# Allegro board 14135-IMX185_MI_REFB_VER_A.brd
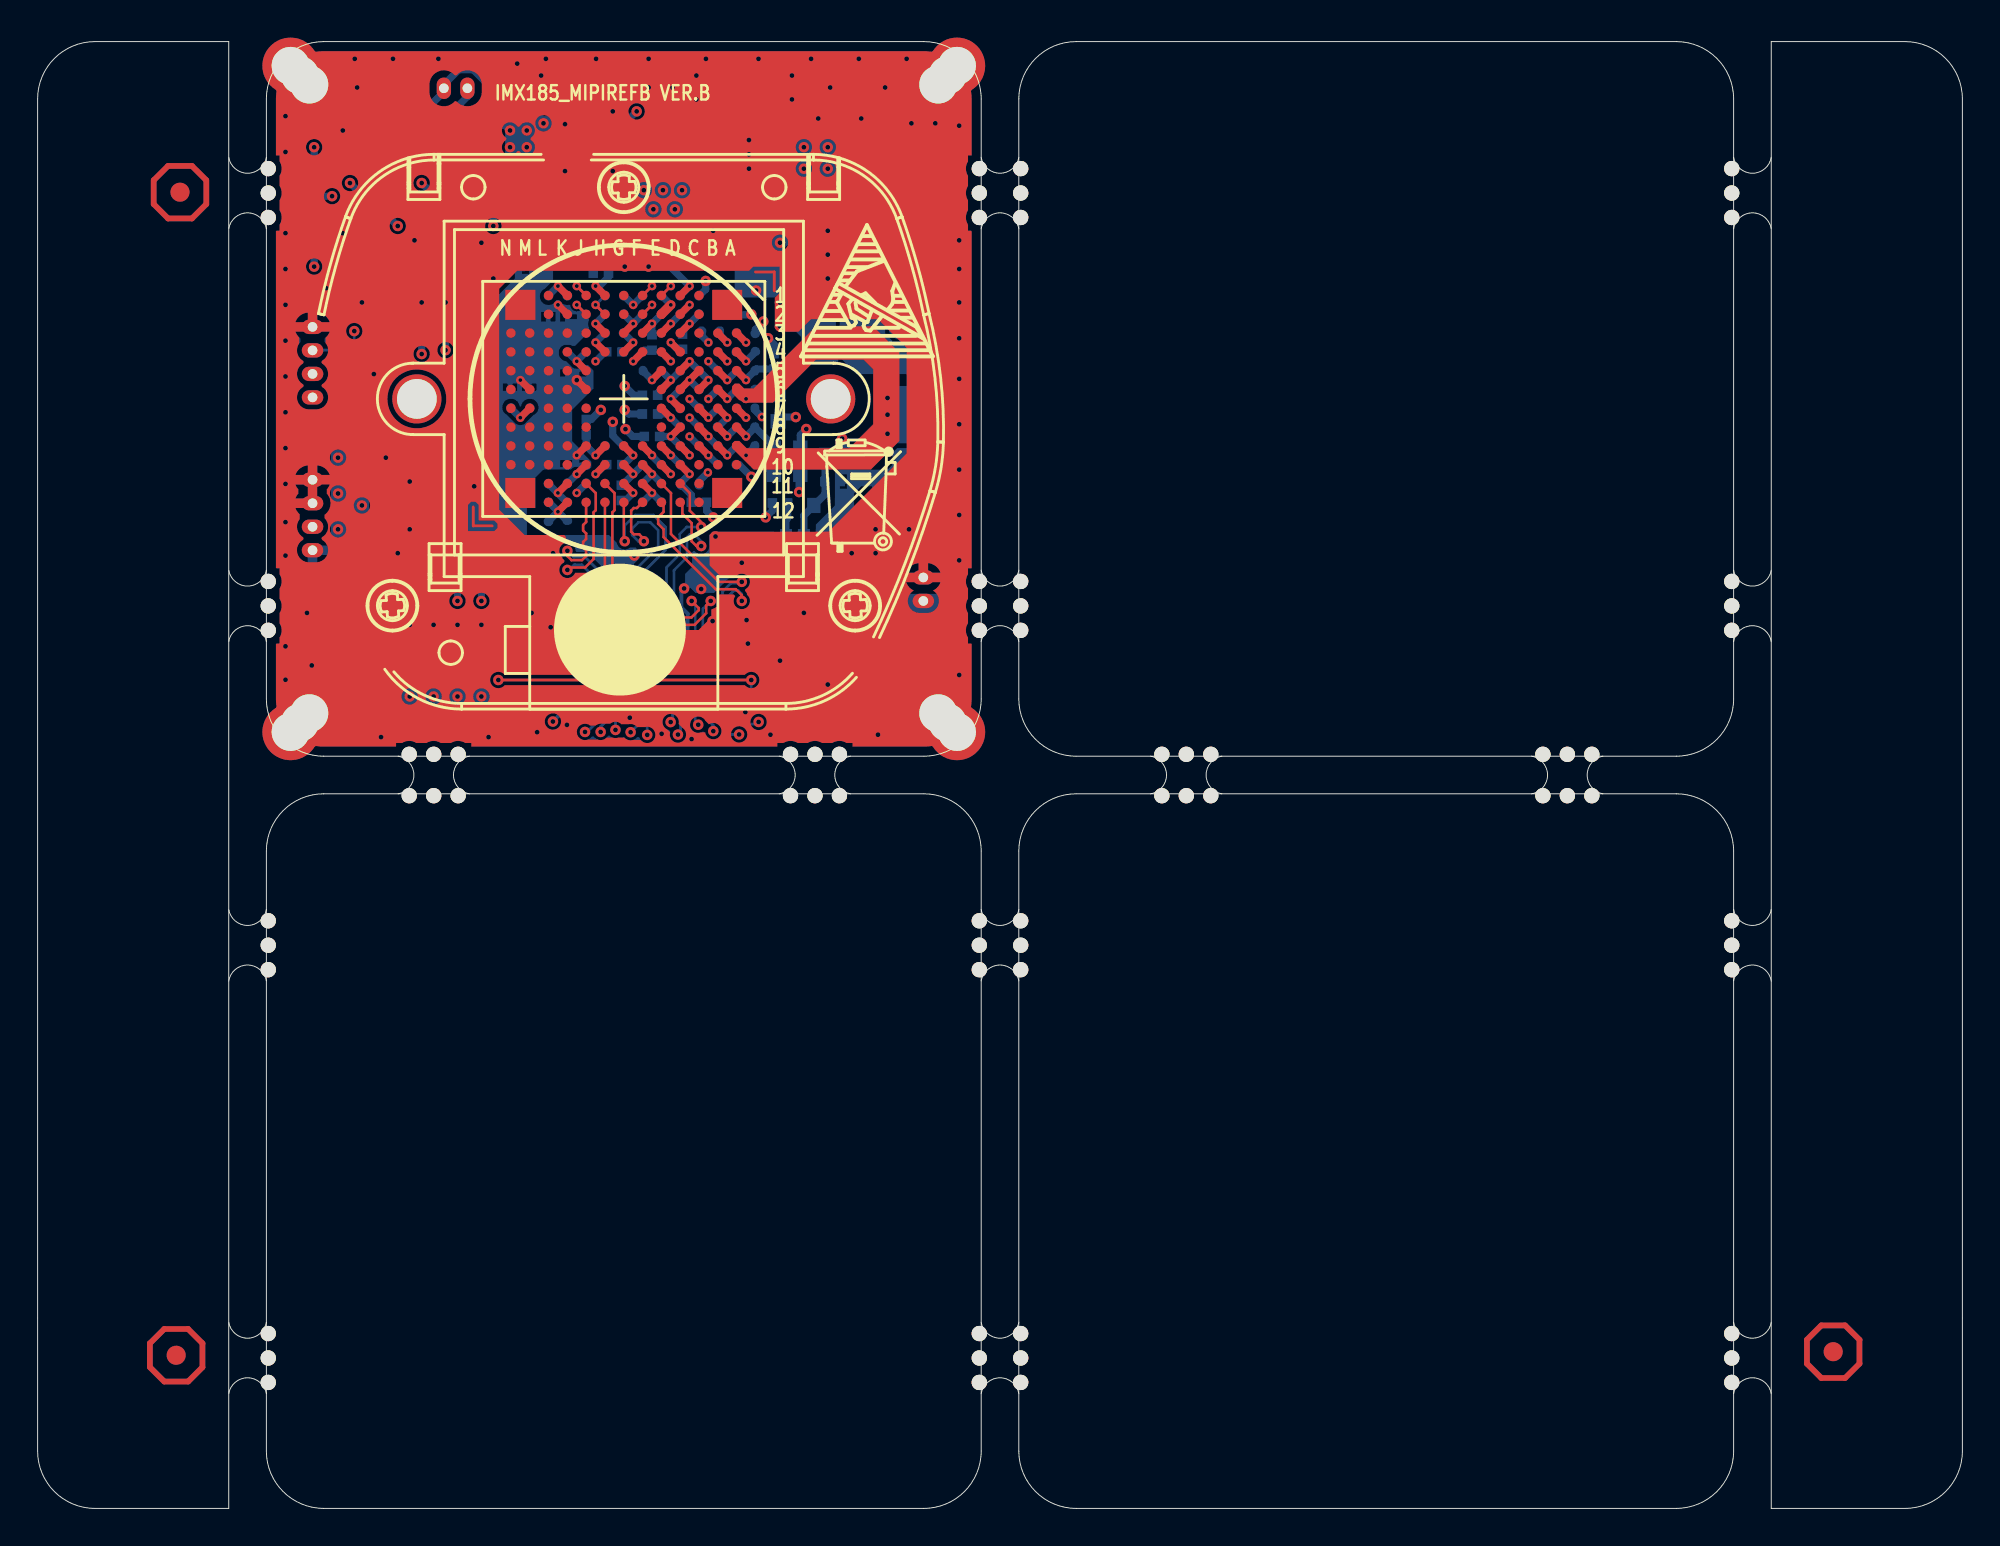
[diagram p0: board, top side]
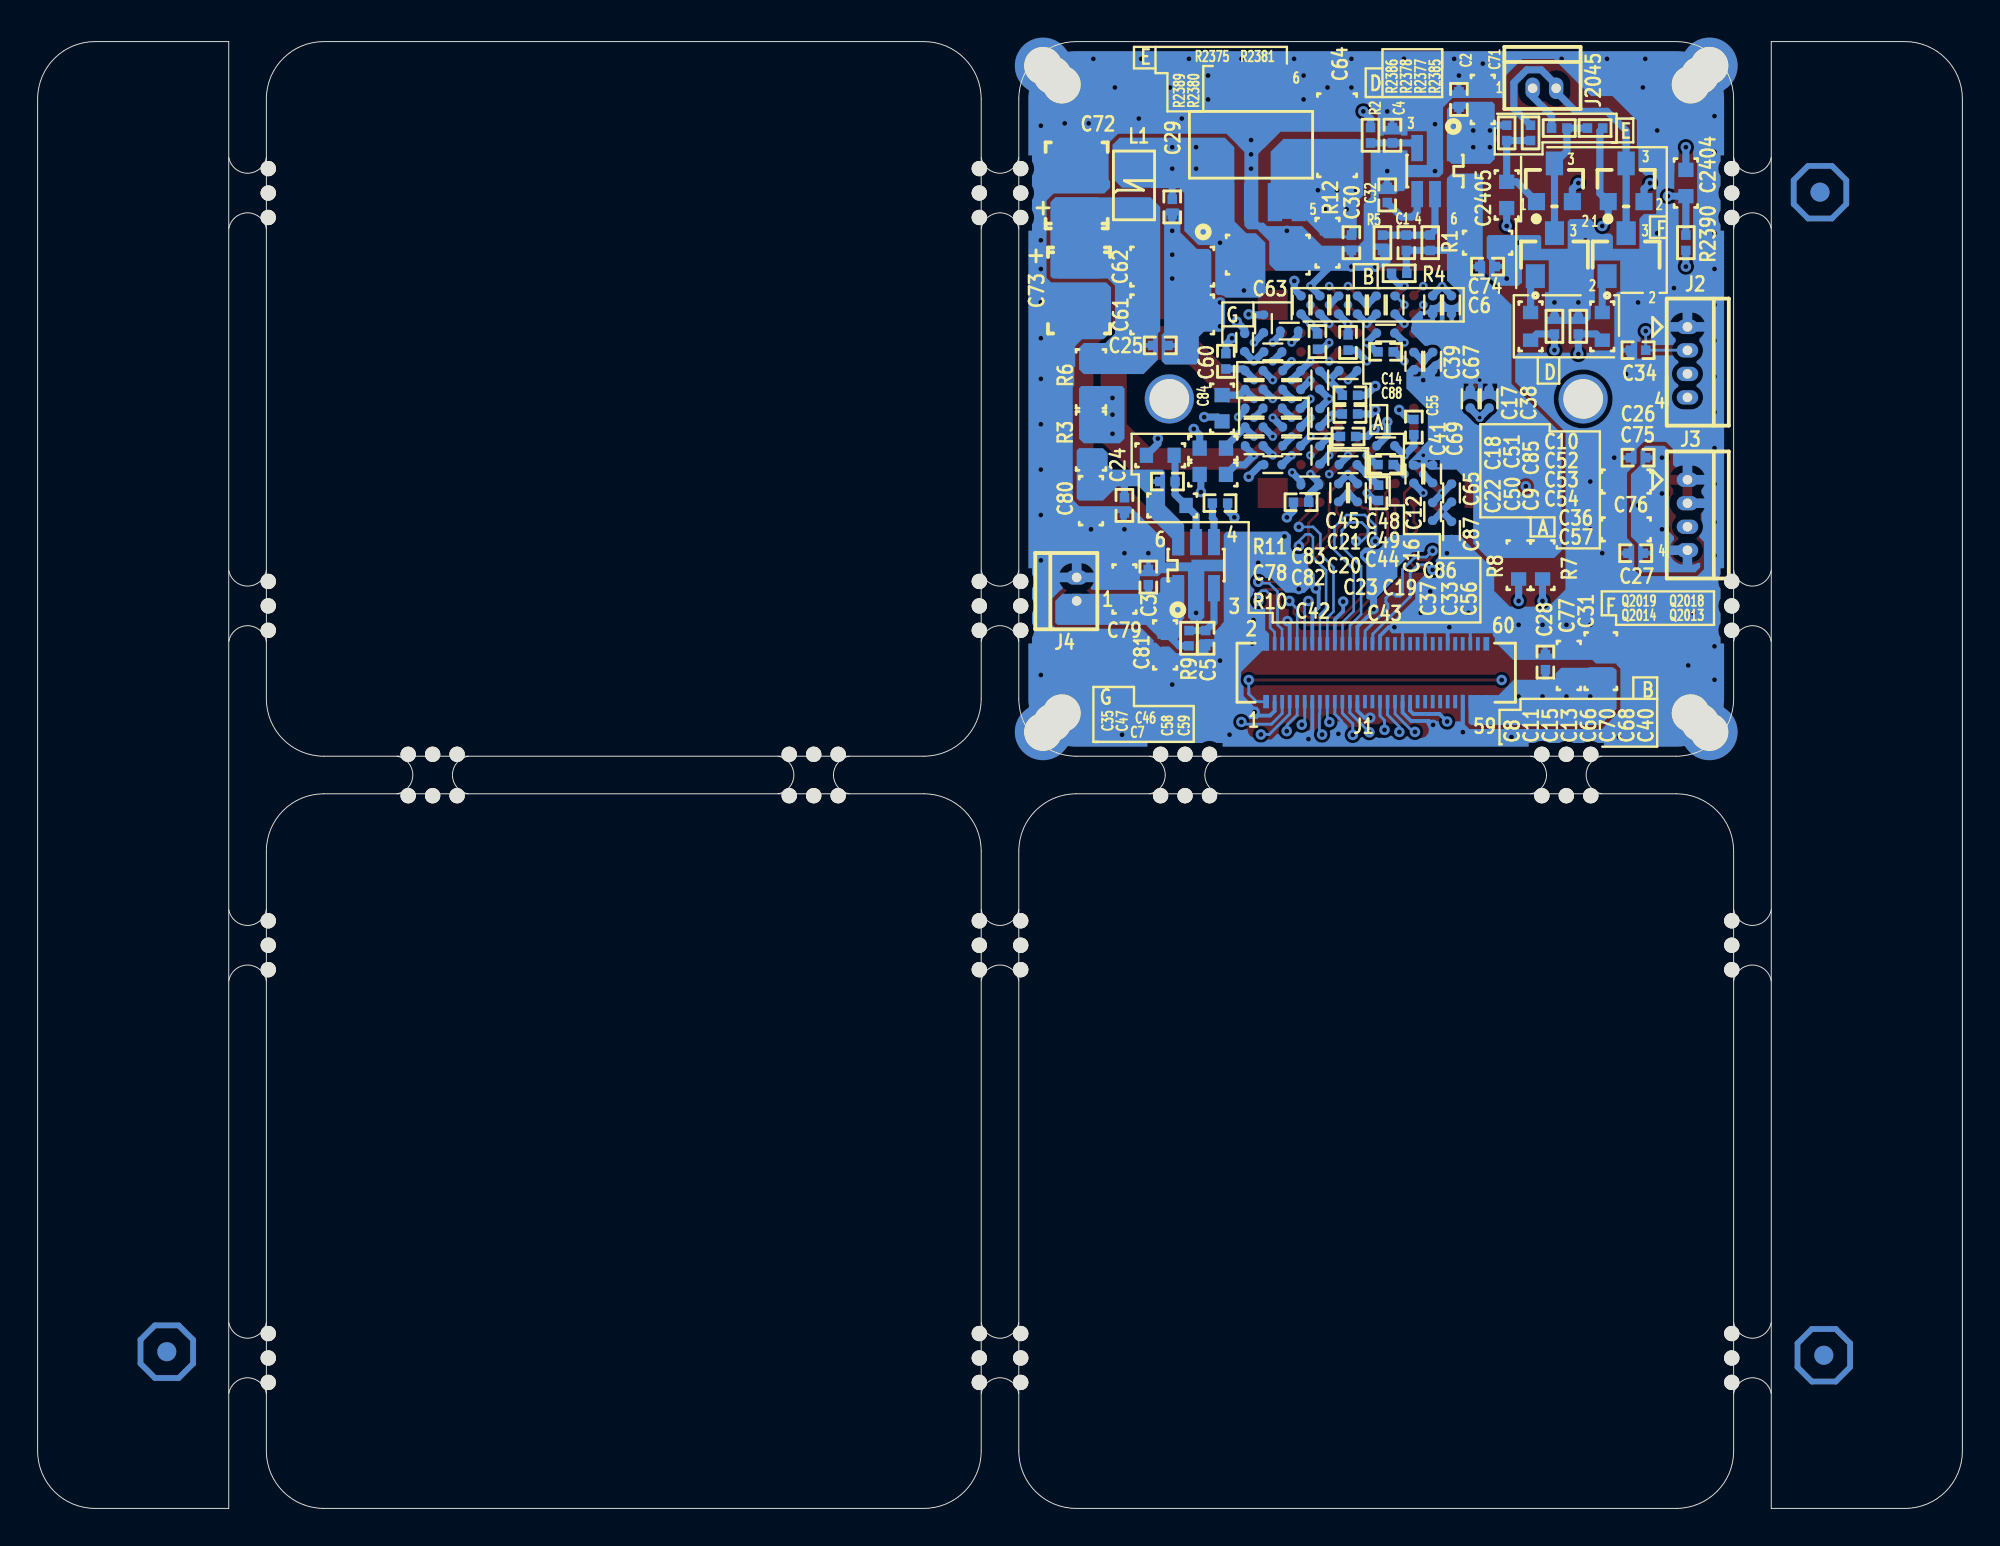
[diagram p1: board, bottom side, seen from below]

Outline 102.32 x 78 mm; copper layers: TOP, GND02, ART03, ART04, POWER05, BOTTOM. Coordinates in mm from the lower left corner of the outline.
Outline path: 0,74.95 arc(0.89,77.11) 3.05,78 10.16,78 10.16,0 3.05,0 arc(0.89,0.89) 0,3.05 0,74.95 ; 12.16,74.95 arc(13.05,77.11) 15.21,78 47.11,78 arc(49.27,77.11) 50.16,74.95 50.16,43.05 arc(49.27,40.89) 47.11,40 15.21,40 arc(13.05,40.89) 12.16,43.05 12.16,74.95 ; 12.16,34.95 arc(13.05,37.11) 15.21,38 47.11,38 arc(49.27,37.11) 50.16,34.95 50.16,3.05 arc(49.27,0.89) 47.11,0 15.21,0 arc(13.05,0.89) 12.16,3.05 12.16,34.95 ; 52.16,74.95 arc(53.05,77.11) 55.21,78 87.11,78 arc(89.27,77.11) 90.16,74.95 90.16,43.05 arc(89.27,40.89) 87.11,40 55.21,40 arc(53.05,40.89) 52.16,43.05 52.16,74.95 ; 52.16,34.95 arc(53.05,37.11) 55.21,38 87.11,38 arc(89.27,37.11) 90.16,34.95 90.16,3.05 arc(89.27,0.89) 87.11,0 55.21,0 arc(53.05,0.89) 52.16,3.05 52.16,34.95 ; 92.16,78 99.27,78 arc(101.43,77.11) 102.32,74.95 102.32,3.05 arc(101.43,0.89) 99.27,0 92.16,0 92.16,78

## Design rules (mm)
net group DIFFPAIR0: nets MIPI0_CKM MIPI0_CKP
net group DIFFPAIR1: nets MIPI0_D3M MIPI0_D3P
net group DIFFPAIR2: nets MIPI0_D0M MIPI0_D0P
net group DIFFPAIR3: nets MIPI0_D1M MIPI0_D1P
net group DIFFPAIR4: nets MIPI0_D2M MIPI0_D2P

## Placement (name value [footprint] x y rotation side)
C1  15PF  [SC0402]  29.56 67.3 90 bottom
C2  15PF  [SC0402]  26.76 74.92 90 bottom
C3  15PF  [SC0402]  43.27 49.52 90 bottom
C4  15PF  [SC0402]  30.3 73.02 90 bottom
C5  15PF  [SC0402]  40.23 46.27 270 bottom
C6  15PF  [SC0402]  25.24 66.03 180 bottom
C7  2.2UF  [SC0402-BGA]  36.65 61.5 180 bottom
C8  2.2UF  [SC0402-BGA]  35.16 64 90 bottom
C9  2.2UF  [SC0402-BGA]  34.16 58 90 bottom
C10  2.2UF  [SC0402-BGA]  32.66 60.5 180 bottom
C11  2.2UF  [SC0402-BGA]  34.16 64 90 bottom
C12  2.2UF  [SC0402-BGA]  28.16 53.01 90 bottom
C13  2.2UF  [SC0402-BGA]  32.16 64 90 bottom
C14  2.2UF  [SC0402-BGA]  30.66 62.5 180 bottom
C15  2.2UF  [SC0402-BGA]  33.16 64 90 bottom
C16  2.2UF  [SC0402-BGA]  34.16 56 270 bottom
C17  2.2UF  [SC0402-BGA]  26.16 59 270 bottom
C18  2.2UF  [SC0402-BGA]  37.65 60.5 180 bottom
C19  2.2UF  [SC0402-BGA]  34.69 54.43 0 bottom
C20  2.2UF  [SC0402-BGA]  37.65 56.5 180 bottom
C21  2.2UF  [SC0402-BGA]  37.65 57.5 180 bottom
C22  2.2UF  [SC0402-BGA]  37.65 59.5 180 bottom
C23  2.2UF  [SC0402-BGA]  36.65 55.5 0 bottom
C24  15PF  [SC0402]  44.54 53.33 270 bottom
C25  15PF  [SC0402]  42.64 61.84 180 bottom
C26  15PF  [SC0402]  17.24 55.87 0 bottom
C27  15PF  [SC0402]  17.37 50.79 0 bottom
C28  15PF  [SC0402]  22.17 45 90 bottom
C29  15PF  [SC0402]  42 69.21 270 bottom
C30  15PF  [SC0402]  32.48 67.3 270 bottom
C31  -  [SC0805]  19.22 45.05 90 bottom
C32  15PF  [SC0402]  30.57 69.84 90 bottom
C33  2.2UF  [SC0402-BGA]  32.16 54.01 270 bottom
C34  15PF  [SC0402]  17.24 61.59 0 bottom
C35  2.2UF  [SC0402-BGA]  38.15 62 90 bottom
C36  2.2UF  [SC0402-BGA]  30.66 56.5 0 bottom
C37  2.2UF  [SC0402-BGA]  33.16 54.01 270 bottom
C38  2.2UF  [SC0402-BGA]  25.16 59 270 bottom
C39  2.2UF  [SC0402-BGA]  29.16 61 90 bottom
C40  2.2UF  [SC0402-BGA]  27.16 64 90 bottom
C41  2.2UF  [SC0402-BGA]  29.16 55 270 bottom
C42  15PF  [SC0402]  39.46 53.46 180 bottom
C43  15PF  [SC0402]  35.16 53.51 0 bottom
C44  2.2UF  [SC0402-BGA]  35.65 56.5 180 bottom
C45  2.2UF  [SC0402-BGA]  37.65 58.5 0 bottom
C46  2.2UF  [SC0402-BGA]  35.78 62.61 180 bottom
C47  2.2UF  [SC0402-BGA]  37.15 63 90 bottom
C48  2.2UF  [SC0402-BGA]  35.68 58.5 180 bottom
C49  2.2UF  [SC0402-BGA]  35.65 57.5 180 bottom
C50  2.2UF  [SC0402-BGA]  35.65 59.5 180 bottom
C51  2.2UF  [SC0402-BGA]  35.65 60.5 180 bottom
C52  15PF  [SC0402]  32.56 59.2 180 bottom
C53  15PF  [SC0402]  32.56 58.2 180 bottom
C54  15PF  [SC0402]  32.66 57 180 bottom
C55  15PF  [SC0402]  29.16 57.5 90 bottom
C56  15PF  [SC0402]  31.03 54.01 270 bottom
C57  15PF  [SC0402]  30.66 55.5 180 bottom
C58  15PF  [SC0402]  34.28 62.05 270 bottom
C59  15PF  [SC0402]  32.66 62 270 bottom
C60  15PF  [SC0402]  39.15 61 90 bottom
C61  -  [SC1206]  42 63.49 180 bottom
C62  -  [SC1206]  42 66.03 180 bottom
C63  -  [SC1206]  36.92 66.67 180 bottom
C64  -  [SC1206]  33.24 73.02 90 bottom
C65  2.2UF  [SC0402-BGA]  27.16 54 90 bottom
C66  2.2UF  [SC0402-BGA]  31.16 64 90 bottom
C67  2.2UF  [SC0402-BGA]  28.16 61 90 bottom
C68  2.2UF  [SC0402-BGA]  28.16 64 90 bottom
C69  2.2UF  [SC0402-BGA]  28.16 55 270 bottom
C70  2.2UF  [SC0402-BGA]  30.16 64 270 bottom
C71  10UF  [SC0603]  25.49 74.92 90 bottom
C72  10uF  [STC3528]  47.08 70.35 90 bottom
C73  10uF  [STC3528]  46.96 64.76 270 bottom
C74  10UF  [SC0603]  25.24 67.3 180 bottom
C75  10UF  [SC0603]  17.87 54.6 0 bottom
C76  10UF  [SC0603]  17.87 52.06 0 bottom
C77  10UF  [SC0603]  20.92 44.83 90 bottom
C78  15PF  [SC0402]  42.26 54.6 180 bottom
C79  10UF  [SC0603]  44.54 48.89 90 bottom
C80  10UF  [SC0603]  46.32 53.59 270 bottom
C81  10UF  [SC0603]  42.39 45.92 270 bottom
C82  10UF  [SC0603]  39.85 54.99 0 bottom
C83  10UF  [SC0603]  39.85 56.38 0 bottom
C84  10UF  [SC0603]  39.36 58.5 270 bottom
C85  2.2UF  [SC0402-BGA]  34.16 60 270 bottom
C86  2.2UF  [SC0402-BGA]  32.66 55.5 0 bottom
C87  2.2UF  [SC0402-BGA]  27.16 52 270 bottom
C88  15PF  [SC0402]  30.66 61.5 180 bottom
C2404  10UF  [SC0603]  14.7 70.48 270 bottom
C2405  10UF  [SC0603]  24.22 69.84 90 bottom
J1  -  [SED60-16F-A]  31.16 44.44 180 bottom
J2  -  [WBC0104-49T]  14.61 62.83 270 bottom
J3  -  [WBC0104-49T]  14.61 54.7 270 bottom
J4  -  [SIP-2P-20]  47.08 48.25 90 bottom
J2045  -  [SIP-2P-20]  22.85 75.52 180 bottom
L1  -  [HSL1007]  44.04 70.35 90 bottom
M1  -  [HOLE_3]  13.45 41.29 90 top
M2  -  [HOLE_3]  47.87 75.71 90 top
M3  -  [HOLE_3]  47.87 42.29 0 top
M4  -  [HOLE_3]  13.45 76.71 0 top
NOREF  -  [unnamed]  7.57 69.99 0 top
NOREF#2  -  [unnamed#2]  59.76 39 180 top
NOREF#3  -  [#3]  -206.92 -128.91 0 top
NOREF#4  -  [unnamed#2]  51.16 6.7 270 top
NOREF#5  -  [unnamed#2]  40.02 39 180 top
NOREF#6  -  [unnamed#2]  51.16 28.65 270 top
NOREF#7  -  [#3]  253.21 150.87 0 top
NOREF#8  -  [#3]  31.97 49.75 0 top
NOREF#9  -  [unnamed#2]  19.76 39 180 top
NOREF#10  -  [#3]  235.68 107.82 0 top
NOREF#11  -  [#3]  204.45 8.51 0 top
NOREF#12  -  [unnamed]  95.45 8.33 0 top
NOREF#13  -  [#3]  43.4 64.26 0 top
NOREF#14  -  [unnamed#2]  51.16 68.65 270 top
NOREF#15  -  [#3]  12.16 74.95 0 top
NOREF#16  -  [unnamed#2]  80.02 39 180 top
NOREF#17  -  [unnamed#4]  11.16 6.7 270 top
NOREF#18  -  [unnamed#4]  11.16 68.65 270 top
NOREF#19  -  [unnamed#4]  11.16 28.65 270 top
NOREF#20  -  [unnamed#2]  51.16 46.69 270 top
NOREF#21  -  [unnamed#4]  11.16 46.69 270 top
NOREF#22  -  [#3]  15.21 0 90 top
NOREF#23  -  [#3]  240 50.67 0 top
NOREF#24  -  [#3]  46.2 53.97 0 top
NOREF#25  -  [unnamed]  7.37 8.14 0 top
NOREF#26  -  [#3]  49.07 77.29 0 top
NOREF#27  -  [#3]  15.21 40 90 top
NOREF#28  -  [unnamed#4]  91.16 46.69 270 bottom
NOREF#29  -  [unnamed]  7.57 69.99 180 bottom
NOREF#30  -  [unnamed#4]  91.16 6.7 270 bottom
NOREF#31  -  [unnamed#4]  91.16 68.65 270 bottom
NOREF#32  -  [unnamed]  95.45 8.33 180 bottom
NOREF#33  -  [unnamed]  7.37 8.14 180 bottom
NOREF#34  -  [unnamed#4]  91.16 28.65 270 bottom
Q2013  -  [SOT23]  17.87 66.67 180 bottom
Q2014  -  [SOT23]  21.68 66.67 180 bottom
Q2018  -  [HSOT23]  17.88 70.48 180 bottom
Q2019  -  [HSOT23]  21.69 70.48 180 bottom
R1  1K  [SR0402]  28.29 67.3 90 bottom
R2  1K  [SR0402]  31.46 73.02 270 bottom
R3  -  [SR0805]  46.32 56.76 90 bottom
R4  1K  [SR0402]  29.94 65.68 0 bottom
R5  1K  [SR0402]  30.83 67.3 270 bottom
R6  -  [SR0805]  46.32 60.07 270 bottom
R7  1.13K  [SR0603]  22.32 50.16 90 bottom
R8  1.13K  [SR0603]  23.59 50.16 90 bottom
R9  1K  [SR0402]  41.12 46.27 90 bottom
R10  1.13K  [SR0603]  42 53.33 0 bottom
R11  1.13K  [SR0603]  42.64 56 180 bottom
R12  1.13K  [SR0603]  33.75 67.3 90 bottom
R2375  1K  [SR0402]  21.43 73.4 0 bottom
R2377  1K  [SR0402]  20.41 62.86 90 bottom
R2378  1K  [SR0402]  21.68 62.86 90 bottom
R2380  1K  [SR0402]  22.95 73.15 90 bottom
R2381  1K  [SR0402]  19.53 73.4 0 bottom
R2385  1.13K  [SR0603]  19.14 62.86 90 bottom
R2386  1.13K  [SR0603]  22.95 62.86 90 bottom
R2389  1K  [SR0402]  24.22 73.15 270 bottom
R2390  1K  [SR0402]  14.7 67.3 90 bottom
U1  -  [SOT223-6A]  37.81 72.51 180 bottom
U2  VALUE  [LGA128-40-1312]  31.16 59 180 top
U3  -  [SOT23-6B]  28.03 71.11 0 bottom
U4  VALUE  [LENS_SOCKET-GS5]  31.16 59 0 top
U5  -  [SOT23-6B]  40.73 50.16 180 bottom

## Library data of the parts
C1-C6 C24-C30 C32 C34 C42 C43 C52-C60 C78 C88 = SC0402
C7-C23 C33 C35-C41 C44-C51 C65-C70 C85-C87 = SC0402-BGA
C31 = SC0805
C61-C64 = SC1206
C71 C74-C77 C79-C84 C2404 C2405 = SC0603
C72 C73 = STC3528
J1 = SED60-16F-A
J2 J3 = WBC0104-49T
J4 J2045 = SIP-2P-20
L1 = HSL1007
M1-M4 = HOLE_3
Q2013 Q2014 = SOT23
Q2018 Q2019 = HSOT23
R1 R2 R4 R5 R9 R2375 R2377 R2378 R2380 R2381 R2389 R2390 = SR0402
R3 R6 = SR0805
R7 R8 R10-R12 R2385 R2386 = SR0603
U1 = SOT223-6A
U2 = LGA128-40-1312
U3 U5 = SOT23-6B
U4 = LENS_SOCKET-GS5

## Footprints (pads in the part's own frame, mm; a bottom-side part is the same pattern mirrored in y, then rotated)
HOLE_3
  round 2.997 hole 2.007: 1(0,0) 2(0.5,-0.5) 3(1,-1)
HSL1007
  rect 0.914x1.626 smd: 1(-1.1,0) 2(1.1,0)
HSOT23
  rect 0.914x0.914 smd: 1(-0.953,-0.991) 2(0.953,-0.991)
  rect 0.914x1.27 smd: 3(0,1.041)
LENS_SOCKET-GS5
  round 2.616 hole 2.108: 1(-11,0) 2(11,0)
LGA128-40-1312
  rect 1.6x1.6 smd: 1(-5.5,-5) 2(-5.5,5) 3(5.5,-5) 4(5.5,5)
  round 0.508 smd: A3(-6,-3.5) A4(-6,-2.5) A5(-6,-1.5) A6(-6,-0.5) A7(-6,0.5) A8(-6,1.5) A9(-6,2.5) A10(-6,3.5) B3(-5,-3.5) B4(-5,-2.5) B5(-5,-1.5) B6(-5,-0.5) B7(-5,0.5) B8(-5,1.5) B9(-5,2.5) B10(-5,3.5) C1(-4,-5.5) C2(-4,-4.5) C3(-4,-3.5) C4(-4,-2.5) C5(-4,-1.5) C6(-4,-0.5) C7(-4,0.5) C8(-4,1.5) C9(-4,2.5) C10(-4,3.5) C11(-4,4.5) C12(-4,5.5) D1(-3,-5.5) D2(-3,-4.5) D3(-3,-3.5) D4(-3,-2.5) D5(-3,-1.5) D6(-3,-0.5) D7(-3,0.5) D8(-3,1.5) D9(-3,2.5) D10(-3,3.5) D11(-3,4.5) D12(-3,5.5) E1(-2,-5.5) E2(-2,-4.5) E3(-2,-3.5) E4(-2,-2.5) E5(-2,-1.5) E6(-2,-0.5) E7(-2,0.5) E8(-2,1.5) E9(-2,2.5) E10(-2,3.5) E11(-2,4.5) E12(-2,5.5) F1(-1,-5.5) F2(-1,-4.5) F3(-1,-3.5) F4(-1,-2.5) F9(-1,2.5) F10(-1,3.5) F11(-1,4.5) F12(-1,5.5) G1(0,-5.5) G2(0,-4.5) G3(0,-3.5) G4(0,-2.5) G9(0,2.5) G10(0,3.5) G11(0,4.5) G12(0,5.5) H1(1,-5.5) H2(1,-4.5) H3(1,-3.5) H4(1,-2.5) H9(1,2.5) H10(1,3.5) H11(1,4.5) H12(1,5.5) J1(2,-5.5) J2(2,-4.5) J3(2,-3.5) J4(2,-2.5) J5(2,-1.5) J6(2,-0.5) J7(2,0.5) J8(2,1.5) J9(2,2.5) J10(2,3.5) J11(2,4.5) J12(2,5.5) K1(3,-5.5) K2(3,-4.5) K3(3,-3.5) K4(3,-2.5) K5(3,-1.5) K6(3,-0.5) K7(3,0.5) K8(3,1.5) K9(3,2.5) K10(3,3.5) K11(3,4.5) K12(3,5.5) L1(4,-5.5) L2(4,-4.5) L3(4,-3.5) L4(4,-2.5) L5(4,-1.5) L6(4,-0.5) L7(4,0.5) L8(4,1.5) L9(4,2.5) L10(4,3.5) L11(4,4.5) L12(4,5.5) M3(5,-3.5) M4(5,-2.5) M5(5,-1.5) M6(5,-0.5) M7(5,0.5) M8(5,1.5) M9(5,2.5) M10(5,3.5) N3(6,-3.5) N4(6,-2.5) N5(6,-1.5) N6(6,-0.5) N7(6,0.5) N8(6,1.5) N9(6,2.5) N10(6,3.5)
SC0402
  rect 0.508x0.508 smd: 1(-0.406,0) 2(0.406,0)
SC0402-BGA
  custom 0.475x0.51 smd: 1(-0.47,0) 2(0.47,0)
SC0603
  rect 0.762x0.813 smd: 1(-0.699,0) 2(0.699,0)
SC0805
  rect 0.991x1.27 smd: 1(-0.813,0) 2(0.813,0)
SC1206
  rect 1.295x1.651 smd: 1(-1.346,0) 2(1.346,0)
SED60-16F-A
  rect 0.305x0.711 smd: 1(-5.851,-1.54) 2(-5.851,1.54) 59(5.851,-1.54) 60(5.851,1.54)
  rect 0.203x0.711 smd: 3(-5.4,-1.54) 4(-5.4,1.54) 5(-5,-1.54) 6(-5,1.54) 7(-4.6,-1.54) 8(-4.6,1.54) 9(-4.2,-1.54) 10(-4.2,1.54) 11(-3.8,-1.54) 12(-3.8,1.54) 13(-3.4,-1.54) 14(-3.4,1.54) 15(-3,-1.54) 16(-3,1.54) 17(-2.6,-1.54) 18(-2.6,1.54) 19(-2.2,-1.54) 20(-2.2,1.54) 21(-1.8,-1.54) 22(-1.8,1.54) 23(-1.4,-1.54) 24(-1.4,1.54) 25(-1,-1.54) 26(-1,1.54) 27(-0.6,-1.54) 28(-0.6,1.54) 29(-0.2,-1.54) 30(-0.2,1.54) 31(0.2,-1.54) 32(0.2,1.54) 33(0.6,-1.54) 34(0.6,1.54) 35(1,-1.54) 36(1,1.54) 37(1.4,-1.54) 38(1.4,1.54) 39(1.8,-1.54) 40(1.8,1.54) 41(2.2,-1.54) 42(2.2,1.54) 43(2.6,-1.54) 44(2.6,1.54) 45(3,-1.54) 46(3,1.54) 47(3.4,-1.54) 48(3.4,1.54) 49(3.8,-1.54) 50(3.8,1.54) 51(4.2,-1.54) 52(4.2,1.54) 53(4.6,-1.54) 54(4.6,1.54) 55(5,-1.54) 56(5,1.54) 57(5.4,-1.54) 58(5.4,1.54)
SIP-2P-20
  oval 0.762x1.143 hole 0.508: 1(0,0) 2(1.25,0)
SOT23
  rect 1.016x1.27 smd: 1(-1.016,-1.143) 2(1.016,-1.143) 3(0,1.143)
SOT23-6B
  rect 0.635x1.397 smd: 1(-0.95,-1.225) 2(0,-1.225) 3(0.95,-1.225) 4(0.95,1.225) 5(0,1.225) 6(-0.95,1.225)
SOT223-6A
  rect 0.762x2.032 smd: 1(-2.54,-3.05) 2(-1.27,-3.05) 3(0,-3.05) 4(1.27,-3.05) 5(2.54,-3.05)
  rect 3.556x2.032 smd: 6(0,3.05)
SR0402
  rect 0.508x0.508 smd: 1(-0.406,0) 2(0.406,0)
SR0603
  rect 0.711x0.813 smd: 1(-0.737,0) 2(0.737,0)
SR0805
  rect 0.838x1.143 smd: 1(-0.927,0) 2(0.927,0)
STC3528
  rect 1.727x2.286 smd: 1(-1.499,0) 2(1.499,0)
unnamed
  round 1.016 smd: 1(0,0)
unnamed#2
  round 0.813 hole 0.813 unplated: (-2.6,1.1) (-2.6,-1.1) (-1.3,1.1) (-1.3,-1.1) (0,1.1) (0,-1.1)
unnamed#4
  round 0.813 hole 0.813 unplated: (-2.6,1.1) (-1.3,1.1) (0,1.1)
WBC0104-49T
  oval 0.762x1.143 hole 0.508: 1(0,0) 2(1.25,0) 3(2.5,0) 4(3.75,0)

## Nets
3V3: C2.1 C26.1 C27.1 C28.1 C29.1 C31.1 C63.1 C71.1 C75.1 C76.1 C77.1 C2404.1 C2405.1 J1.55 J1.57 J1.59 J2.4 J3.4 L1.2 Q2018.2 Q2019.2 R2.1 R2389.1 R2390.1 U1.1 U1.2 U3.1
5V0: C3.1 C79.1 C81.1 J4.1 R9.1 U5.1
AVDD_3V3: C18.1 C19.1 C20.1 C21.1 C22.1 C43.1 C60.1 C82.1 C83.1 C84.1 R3.2 R6.2 U2.A5 U2.A6 U2.A8 U2.A9 U2.D10
DVDD_1V2: C7.1 C8.1 C9.1 C10.1 C11.1 C12.1 C13.1 C14.1 C15.1 C16.1 C30.1 C33.1 C35.1 C36.1 C37.1 C52.1 C53.1 C54.1 C55.1 C56.1 C57.1 C58.1 C59.1 C64.1 C65.1 C66.1 C85.1 C86.1 C87.1 C88.1 R12.2 U1.4 U1.5 U2.A4 U2.D3 U2.D8 U2.E3 U2.E6 U2.E7 U2.F3 U2.F10 U2.G3 U2.G4 U2.G9 U2.G10 U2.H9 U2.K12
GND: C2.2 C3.2 C4.2 C5.2 C6.2 C7.2 C8.2 C9.2 C10.2 C11.2 C12.2 C13.2 C14.2 C15.2 C16.2 C17.2 C18.2 C19.2 C20.2 C21.2 C22.2 C23.2 C24.2 C25.2 C26.2 C27.2 C28.2 C29.2 C30.2 C31.2 C32.2 C33.2 C34.2 C35.2 C36.2 C37.2 C38.2 C39.2 C40.2 C41.2 C42.2 C43.2 C44.2 C45.2 C46.2 C47.2 C48.2 C49.2 C50.1 C51.1 C52.2 C53.2 C54.2 C55.2 C56.2 C57.2 C58.2 C59.2 C60.2 C61.2 C62.2 C63.2 C64.2 C65.2 C66.2 C67.2 C68.2 C69.2 C70.2 C71.2 C72.2 C73.2 C74.2 C75.2 C76.2 C77.2 C79.2 C80.2 C81.2 C82.2 C83.2 C84.2 C85.2 C86.2 C87.2 C88.2 J1.2 J1.3 J1.8 J1.13 J1.14 J1.19 J1.20 J1.25 J1.26 J1.32 J1.37 J1.38 J1.44 J1.50 J1.53 J1.56 J2.1 J3.1 J3.2 J4.2 M1.1 M1.2 M1.3 M2.1 M2.2 M2.3 M3.1 M3.2 M3.3 M4.1 M4.2 M4.3 Q2013.2 Q2014.2 R5.2 R11.1 R12.1 R2377.2 R2378.2 U1.3 U1.6 U2.B4 U2.B5 U2.B6 U2.B8 U2.B9 U2.D1 U2.D2 U2.D4 U2.D7 U2.D9 U2.E2 U2.E4 U2.E5 U2.E9 U2.E10 U2.F4 U2.F9 U2.F11 U2.G11 U2.H3 U2.H4 U2.H10 U2.J5 U2.J10 U2.K1 U2.K11 U2.M7 U3.2 U5.2
DRV0: J2045.1 R2375.2
DRV1: J2045.2 Q2013.3 Q2018.3 R2380.2
FLASH_TRIG: J1.27
GPIO1: J1.41
GPIO2: J1.43
GPIO3: J1.45
GPIO4: J1.47
GPIO5: J1.49
GPIO6: J1.51
IR-LED-CONTROL: C34.1 J1.31 J2.2
IRCUT-CONTROL1: J1.33 R2377.1 R2385.1
IRCUT-CONTROL2: J1.35 R2378.1 R2386.1
LIGHT-RESISTOR: J1.1 J2.3
MIPI0_CKM: J1.22 U2.G12
MIPI0_CKP: J1.24 U2.F12
MIPI0_D0M: J1.10 U2.H12
MIPI0_D0P: J1.12 U2.H11
MIPI0_D1M: J1.4 U2.E12
MIPI0_D1P: J1.6 U2.E11
MIPI0_D2M: J1.28 U2.J12
MIPI0_D2P: J1.30 U2.J11
MIPI0_D3M: J1.16 U2.D12
MIPI0_D3P: J1.18 U2.D11
OVDD_1V8: C1.1 C6.1 C17.1 C38.1 C39.1 C40.1 C41.1 C67.1 C68.1 C69.1 C74.1 R1.1 R4.1 R7.2 R8.2 U2.J6 U2.J9 U2.K2 U2.M6 U3.6
PWM: J1.39 J3.3
SENSOR_CLK: J1.17 U2.J1
SENSOR_RESET: C70.1 J1.15 U2.H2
SHUTTER_TRIG: J1.29
SPI0_CLK: J1.5 U2.J2
SPI0_CS: J1.9 U2.F2
SPI0_MISO: J1.11 U2.E1
SPI0_MOSI: J1.7 U2.F1
VI_POWER1: J1.21 R8.1
VI_POWER2: J1.23 R7.1
$3N29: C4.1 R2.2 U3.3
$3N34: C32.1 U3.4
$3N39: C1.2 R1.2 R5.1 U3.5
$3N342: C78.2 R10.1 R11.2 U5.5
$3N343: C42.1 U5.4
$3N344: C5.1 R9.2 U5.3
$3N361: C24.1 C78.1 C80.1 R3.1 R10.2 U5.6
$3N401: C25.1 C61.1 C62.1 C72.1 C73.1 L1.1 R6.1
$4N521: C49.1 U2.B7
$4N523: C48.1 U2.C7
$4N534: C47.1 U2.A3
$4N536: C46.1 U2.B3
$4N538: C45.1 U2.A7
$4N542: C44.1 U2.C8
$4N544: C23.1 U2.C9
$4N555: C51.2 U2.C6 U2.D5
$4N557: C50.2 U2.C5 U2.D6
$4N622: R4.2 U2.H1
$5N8: C2404.2 Q2018.1 R2381.1 R2390.2
$5N9: C2405.2 Q2019.1 R2380.1 R2389.2
$5N33: Q2014.3 Q2019.3 R2375.1 R2381.2
$5N37: Q2013.1 R2385.2
$5N49: Q2014.1 R2386.2

Pads without a net: J1 34 36 40 42 46 48 52 54 58 60; NOREF 1; NOREF#12 1; NOREF#25 1; NOREF#29 1; NOREF#32 1; NOREF#33 1; U2 1 2 3 4 A10 B10 C1 C2 C3 C4 C10 C11 C12 E8 G1 G2 J3 J4 J7 J8 K3 K4 K5 K6 K7 K8 K9 K10 L1 L2 L3 L4 L5 L6 L7 L8 L9 L10 L11 L12 M3 M4 M5 M8 M9 M10 N3 N4 N5 N6 N7 N8 N9 N10; U4 1 2

## Via types
v1: diameter 0.559, hole 0.254, TOP to BOTTOM, 201 vias
v2: diameter 0.457, hole 0.203, TOP to BOTTOM, 77 vias

## Routing (per net, layer and track width the routed paths; a pad name or vN(x,y) marks a point on that pad's centre or on a via; arc(x,y) is an arc through that point)
3V3: length 15.5
  POWER05 w0.508: 14.61,58.13 J2.4 15.86,59.08 ; 16.05,50.95 J3.4 14.61,49.81
  BOTTOM w0.381: R2389.1 24.83,73.55 v1(25.11,73.27) ; C2405.1 v1(24.22,68.19) ; R2390.1 v1(14.7,66.03) ; C29.1 42,70.38 ; Q2019.2 20.73,70.16 v1(20.41,70.48) ; v1(16.6,70.48) 16.92,70.16 Q2018.2 ; v1(31.84,74.29) 31.46,73.91 R2.1 ; C2404.1 v1(14.7,72.38) ; C28.1 22.17,43.91
  BOTTOM w0.508: 15.69,50.95 J3.4 14.61,50.06
  vias: v1(15.97,55.87) v1(15.97,53.97) v1(15.97,52.06) v1(17.24,53.33) v1(19.78,43.17) v1(21.05,43.17) v1(22.32,43.17) v1(23.59,43.17) v1(25.11,72.38) v1(26,73.27) v1(26,72.38) v1(26.89,73.65) v1(38.19,64.76) v1(39.46,67.3) v1(40.73,72.38) v1(40.73,71.24) v1(42,72.38) v1(42,71.24)
5V0: length 2.4
  BOTTOM w0.381: C3.1 43.27,48.25 ; C81.1 41.64,45.87 R9.1
AVDD_3V3: length 13.4
  TOP w0.381: U2.D10 v2(34.66,55) ; U2.A8 v2(37.66,57) ; U2.A6 v2(37.66,59) ; U2.A5 v2(37.66,60)
  BOTTOM w0.381: C60.1 38.22,60.59 C18.1 37.66,60.04 v2(37.66,60) ; v2(34.66,55) 34.22,54.56 C19.1 34.75,53.9 C43.1 ; C82.1 38.64,55.49 38.17,55.49 v2(37.66,56) 38.12,56.46 C20.1 ; v2(37.66,57) 38.12,57.46 C21.1 39.15,56.48 C83.1 ; v2(37.66,59) 38.12,59.46 C22.1 38.42,59.2 C84.1
  vias: v1(45.18,59.05) v1(45.18,58.16) v1(45.18,57.14)
DVDD_1V2: length 31.3
  TOP w0.381: U2.E7 v2(33.66,58) ; U2.G3 v2(31.66,63) ; U2.H9 v2(29.66,56) ; U2.K12 v2(27.66,53) ; U2.F3 v2(32.66,63) ; U2.E6 v2(33.66,60) ; U2.D8 v2(33.66,57) ; U2.G10 v2(31.66,55) ; U2.E3 v2(33.66,63) ; U2.A4 v2(37.66,61) ; U2.G4 v2(31.66,62) ; U2.F10 v2(32.66,55) ; U2.D3 v2(34.66,63) ; U2.G9 v2(31.66,56)
  BOTTOM w0.381: v2(33.66,60) 32.96,59.3 C52.1 ; v2(33.66,60) 33.16,60.5 C10.1 ; v2(33.66,60) 34.13,60.47 C85.1 ; C88.1 31.16,61.5 v2(31.66,62) U2.G3 C14.1 ; v2(27.66,53) 28.12,52.54 C12.1 ; v2(27.66,53) 27.16,52.5 C87.1 ; v2(27.66,53) 27.66,53.03 C65.1 ; C58.1 34.28,62.62 v2(34.66,63) 35.16,63.5 C8.1 ; C54.1 33.66,57 v2(33.66,57) 34.16,56.5 C16.1 ; C11.1 34.16,63.5 v2(33.66,63) ; C53.1 33.46,58.2 v2(33.66,58) 34.13,57.53 C9.1 ; C35.1 38.15,61.49 v2(37.66,61) U2.A4 C7.1 ; C15.1 33.16,63.5 v2(32.66,63) 32.66,63 C59.1 ; C36.1 30.16,56.5 v2(29.66,56) 29.16,56.5 C55.1 ; C13.1 32.16,63.5 v2(31.66,63) 31.16,63.5 C66.1 ; C56.1 31.07,54.41 v2(31.66,55) U2.F10 C86.1 ; C37.1 33.16,54.5 v2(32.66,55) 32.16,54.5 C33.1 ; v2(31.66,56) 31.16,55.5 C57.1
  vias: v1(32.23,70.1) v1(32.73,69.08) v1(33.24,70.1) v1(33.88,69.08) v1(34.26,70.1)
GND: length 146.8
  TOP w0.381: U2.D9 v2(34.66,56) ; U2.D2 v2(34.66,64) ; U2.B6 v2(36.66,59) ; U2.E10 v2(33.66,55) ; U2.M7 v2(25.66,58) ; U2.B4 v2(36.66,61) ; U2.H3 v2(29.66,63) ; U2.K11 v2(27.66,54) ; U2.J5 v2(28.66,61) ; v2(33.66,61) U2.E4 ; U2.D7 v2(33.66,59) ; U2.D4 v2(33.66,62) ; U2.J10 v2(28.66,55) ; U2.F9 v2(32.66,56) ; U2.K1 v2(27.66,65) ; U2.D1 v2(34.66,65) ; U2.F11 v2(32.66,54) ; U2.G11 v2(31.66,54) ; U2.B8 v2(36.66,57) ; U2.B9 v2(36.66,56) ; U2.E5 v2(32.66,60) ; U2.B5 v2(36.66,60) ; U2.E9 v2(33.66,56) ; U2.F4 v2(31.66,61) ; U2.H10 v2(29.66,55) ; U2.H4 v2(29.66,62)
  TOP w0.508: J4.2 48.16,49.5 ; J4.2 47.08,50.39 ; J4.2 46.01,49.5 ; 13.54,53.45 J3.2 J3.1 ; 13.54,62.83 J2.1 ; J2.1 15.69,62.83 ; J2.1 14.61,63.72 ; J3.1 14.61,55.59 ; J3.1 15.69,54.7 ; J3.1 13.4,54.7 v1(13.18,54.48) ; U2.E2 v2(33.66,64)
  ART03 w0.508: 46.01,49.5 J4.2 ; J4.2 47.08,50.39 ; J4.2 48.16,49.5 ; J2.1 15.69,62.83 ; J2.1 14.61,63.72 ; J2.1 13.54,62.83 ; 13.54,53.45 J3.2 ; 13.54,54.7 J3.1 ; J3.1 14.61,55.59 ; J3.1 15.69,54.7
  ART04 w0.508: J2.1 14.61,63.72 ; J2.1 15.69,62.83 ; J2.1 13.54,62.83 ; J4.2 47.08,50.39 ; J4.2 46.01,49.5 ; J4.2 48.16,49.5 ; 13.54,54.7 J3.1 ; J3.1 15.69,54.7 ; J3.1 14.61,55.59 ; 13.54,53.45 J3.2
  BOTTOM w0.152: J1.19 33.36,42.24 33.14,42.03 33.14,42.02 33.01,41.88 33.01,41.35 v1(33.17,41.19) ; 37.75,45.98 v1(37.76,45.99) ; J1.44 28.56,46.8 ; J1.56 26.16,46.8 ; J1.38 29.76,46.78
  BOTTOM w0.203: v1(30.19,46.86) 30.5,46.86 30.96,46.4 J1.32 ; J1.14 34.56,47.57 34.22,47.91 34.22,48.71 34.34,48.83 34.34,48.9 v1(34.37,48.92) ; v1(27.27,46.86) 27.36,46.77 J1.50 ; J1.13 34.56,41.39 34.76,41.18 v1(34.76,40.91) ; J1.26 32.16,46.88 31.3,47.74 v1(31.3,47.83) ; v1(31.48,42.05) 31.48,42.05 31.79,42.05 32.16,42.42 J1.25 ; v1(28.14,41.66) 28.35,41.87 29.31,41.87 29.76,42.32 J1.37 ; J1.8 35.76,47.05 35.85,47.14 35.85,47.16 v1(35.88,47.19) ; v1(32.92,48.22) 32.92,47.71 33.36,47.27 J1.20 ; J1.3 36.56,42.4 36.8,42.16 37.44,42.16 v1(37.62,42.35) ; v1(26.55,41.28) 26.56,41.28 J1.53
  BOTTOM w0.381: v2(36.66,60) 37.16,60.5 C18.2 ; C14.2 U2.H3 v2(29.66,62) ; v1(17.87,60.32) 17.65,60.55 C34.2 ; v1(40.86,57.4) 40.54,57.08 C83.2 ; C68.2 U2.K1 v2(27.66,65) 27.16,64.5 C40.2 ; C47.2 37.91,63.47 v1(37.94,63.49) ; C49.2 35.16,57.5 v2(34.66,58) ; C7.2 36.18,61.48 v2(36.66,61) ; C41.2 29.16,54.5 v2(28.66,54) ; C69.2 28.2,54.54 v2(28.66,55) ; C8.2 35.52,64.83 v1(35.52,65.27) ; v1(34.37,48.92) 34.68,49.23 34.81,49.23 ; 31.25,48.74 31.3,48.68 v1(31.3,47.83) ; R2378.2 v1(21.68,64.13) ; C59.2 32.25,61.59 v2(31.66,61) ; C52.2 31.7,59.2 v1(31.21,59.68) ; C10.2 32.19,60.47 v2(32.66,60) ; v2(34.66,59) 35.16,58.5 C48.2 ; C16.2 34.13,55.53 v2(33.66,56) ; C11.2 34.16,64.5 v2(34.66,65) 33.75,65.91 R12.1 ; C37.2 33.12,53.54 v2(32.66,54) 32.2,53.54 C33.2 ; C46.2 35.31,62.35 v2(35.66,62) ; C67.2 28.19,61.47 v2(28.66,61) 29.13,61.47 C39.2 ; Q2013.2 16.86,64.51 v1(17.24,64.13) ; v1(40.3,58.03) 39.59,58.03 C84.2 ; v2(29.66,55) 30.16,55.5 C57.2 ; v2(34.66,57) 35.16,56.5 C44.2 ; v1(42.77,56.89) 42.77,56.61 R11.1 ; C51.1 36.12,60.54 v2(35.66,61) ; C43.2 35.56,53.05 v1(35.91,52.7) ; C56.2 31.26,53.6 v2(31.66,54) ; C58.2 34.02,61.64 v2(33.66,62) ; C70.2 30.16,63.5 v2(29.66,63) ; C88.2 30.16,61.5 v2(29.66,61) ; Q2014.2 20.67,64.38 v1(20.41,64.13) R2377.2 ; v2(38.5,58.03) 38.12,58.41 C45.2 ; v1(31.21,58.41) 31.43,58.2 C53.2 ; v1(38.83,62.22) 39.15,61.9 C60.2 ; C20.2 37.16,56.5 v2(36.66,56) ; C82.2 40.48,54.92 v1(40.48,54.05) ; U5.2 v1(40.73,47.62) ; C50.1 36.12,59.46 v2(35.66,59) ; C86.2 32.66,55.97 v2(32.66,56) ; C36.2 31.11,56.5 30.57,57.04 v1(30.57,57.78) ; C19.2 35.16,54.62 v2(35.63,55.09) ; C23.2 37.3,55.5 v1(37.94,54.86) ; C55.2 29.43,57.91 v1(29.94,58.41) ; C65.2 27.63,54 v2(27.66,54) 27.66,53.98 C12.2 ; v1(27.4,50.79) 27.4,51.35 27.16,51.59 ; C85.2 34.16,59.5 v2(33.66,59) 34.16,58.5 C9.2 ; C35.2 38.15,62.69 v1(38.58,63.11) ; v2(36.66,57) 37.16,57.5 C21.2 ; v2(33.66,64) 33.19,64.47 C15.2 ; C13.2 32.13,64.47 v2(31.66,64) 31.19,64.47 C66.2 ; C54.2 31.63,57 31.25,57.38 v1(31.25,57.39) ; v1(28.03,73.61) U3.2 v1(28.03,71.11) ; v1(38.7,52.7) 39.06,53.06 C42.2 ; C38.2 25.16,58.5 v2(25.66,58) 26.16,58.5 C17.2 ; v2(36.66,59) 37.16,59.5 C22.2
  BOTTOM w0.508: J4.2 47.08,50.39 ; J4.2 48.16,49.5 ; J4.2 46.01,49.5 ; 13.64,54.7 J3.1 14.61,55.64 ; 13.54,62.83 J2.1 ; J2.1 14.61,63.72 ; J2.1 15.69,62.83 ; J3.2 13.47,53.45
  vias: v1(13.18,74.04) v1(13.18,72.13) v1(13.18,67.81) v1(13.18,65.91) v1(13.18,64) v1(13.18,62.1) v1(13.18,60.19) v1(13.18,58.29) v1(13.18,56.38) v1(13.18,52.45) v1(13.18,50.67) v1(13.18,45.84) v1(13.18,44.06) v1(14.32,47.62) v1(14.57,44.83) v1(15.33,64.89) v1(16.22,73.27) v1(16.22,67.81) v1(16.86,77.08) v1(16.99,75.56) v1(18.26,41.02) v1(18.51,55.87) v1(18.89,77.08) v1(19.14,50.79) v1(19.78,54.6) v1(19.78,52.06) v1(19.78,46.98) v1(20.03,67.43) v1(21.05,46.98) v1(21.3,77.08) v1(22.32,46.98) v1(23.21,54.35) v1(23.59,67.3) v1(23.59,46.98) v1(23.97,41.02) v1(24.22,65.4) v1(25.49,76.83) v1(26.26,47.62) v1(26.76,76.19) v1(27.02,77.08) v1(28.29,48.76) v1(28.8,47.62) v1(29.69,77.08) v1(30.57,74.29) v1(30.57,71.11) v1(31.21,66.03) v1(31.72,50.67) v1(32.48,77.08) v1(32.48,75.56) v1(32.48,66.03) v1(33.75,75.56) v1(35.02,76.19) v1(35.02,74.92) v1(35.27,48.89) v1(35.53,77.08) v1(35.91,67.94) v1(36.04,51.68) v1(37.43,50.29) v1(37.69,47.24) v1(37.81,72.77) v1(37.81,72) v1(37.81,71.24) v1(38.32,77.08) v1(38.96,41.14) v1(39.46,64.13) v1(39.46,62.86) v1(39.46,45.08) v1(40.1,76.19) v1(40.1,74.92) v1(41.12,77.08) v1(41.5,73.91) v1(42,67.94) v1(42,66.67) v1(42,65.4) v1(42,43.81) v1(42.13,75.56) v1(43.27,50.79) v1(43.66,77.08) v1(43.78,73.91) v1(44.54,52.06) v1(44.54,50.79) v1(44.67,41.14) v1(45.05,75.56) v1(46.2,77.08) v1(46.32,52.06) v1(46.45,73.65) v1(47.72,73.65) v1(48.99,73.53) v1(48.99,67.43) v1(48.99,65.91) v1(48.99,64.13) v1(48.99,62.22) v1(48.99,60.07) v1(48.99,57.65) v1(48.99,55.24) v1(48.99,52.83) v1(48.99,50.41) v1(48.99,44.32)
DRV0: length 2.5
  BOTTOM w0.381: J2045.1 22.85,75.07 21.84,74.06 R2375.2
DRV1: length 15.9
  BOTTOM w0.381: R2380.2 23.84,74.44 23.84,75.81 23.16,76.5 22.39,76.5 21.6,75.71 J2045.2 21.6,75.33 20.56,74.29 18.89,74.29 17.87,73.27 17.87,72.54 17.88,72.54 Q2018.3 17.87,71.52 17.87,67.81
IR-LED-CONTROL: length 36.5
  ART03 w0.152: v1(30.72,41.4) 28.82,43.3 27.4,43.3 24.61,46.09 22.45,46.09 21.65,46.88 21.65,49.35 22.36,50.06 22.36,60.12 21.09,61.4 21.09,61.76 20.24,62.61 v1(16.83,62.61)
  BOTTOM w0.152: v1(16.83,62.61) C34.1 14.62,61.59 J2.2 ; J1.31 30.96,42.15 30.72,41.91 v1(30.72,41.4)
IRCUT-CONTROL1: length 32.1
  ART03 w0.152: v1(20.41,61.39) 21.98,59.82 21.98,50.2 20.41,48.64 20.41,46.73 22.25,44.9 25.11,44.9 27.25,42.76 28.46,42.76 v1(29.93,41.29)
  BOTTOM w0.152: J1.33 30.56,42.2 29.93,41.57 v1(29.93,41.29)
  BOTTOM w0.381: R2385.1 19.48,62.45 R2377.1 v1(20.41,61.39)
IRCUT-CONTROL2: length 28.8
  ART04 w0.152: v1(29.1,41.29) 29.1,42.18 28.59,42.69 26.72,42.69 23.02,46.39 23.02,49.07 22.57,49.52 22.57,60.7 v1(21.68,61.59)
  BOTTOM w0.152: J1.35 30.16,42.25 29.2,41.29 v1(29.1,41.29)
  BOTTOM w0.381: R2386.1 22.62,62.45 R2378.1 v1(21.68,61.59)
LIGHT-RESISTOR: length 38.8
  TOP w0.152: v1(37.94,44.05) v1(24.49,44.05)
  ART03 w0.152: v1(24.49,44.05) 19.34,44.05 17.75,45.64 17.75,57.45 14.87,60.33 J2.3
  BOTTOM w0.152: v1(37.94,44.05) 37.94,43.31 37.52,42.9 J1.1
MIPI0_CKM: length 12.5
  TOP w0.14: U2.G12 31.16,51.48 v1(31.21,51.43)
  BOTTOM w0.14: J1.22 32.95,45.99 32.95,47.11 32.36,47.71 32.36,49.94 33.38,50.97 33.38,52.18 32.73,52.83 31.77,52.83 31.21,52.27 v1(31.21,51.43)
MIPI0_CKP: length 12.4
  TOP w0.14: v1(32.23,51.43) 32.23,51.56 31.98,51.8 31.69,51.8 31.55,51.94 31.55,53.06 31.69,53.2 31.86,53.2 U2.F12
  BOTTOM w0.14: v1(32.23,51.43) 31.93,51.43 31.6,51.76 31.6,52.1 31.93,52.43 32.57,52.43 32.99,52.02 32.99,51.13 31.96,50.1 31.96,47.55 32.56,46.95 J1.24
MIPI0_D0M: length 13.8
  TOP w0.14: v1(35.78,48.25) 35.54,48.01 35.54,47.6 34.92,46.98 32.86,46.98 30.16,49.69 U2.H12
  BOTTOM w0.14: J1.10 35.36,47.83 v1(35.78,48.25)
MIPI0_D0P: length 13.7
  TOP w0.14: v1(34.77,48.25) 35.15,47.87 35.15,47.77 34.76,47.38 33.02,47.38 30.55,49.85 30.55,52.97 30.67,53.08 30.67,53.99 U2.H11
  BOTTOM w0.14: v1(34.77,48.25) 34.96,48.06 34.96,48 34.97,48 34.97,45.99 J1.12
MIPI0_D1M: length 11.7
  TOP w0.14: U2.E12 33.27,53.39 33.27,52.99 32.99,52.7 32.99,52.36 33.27,52.07 33.27,51.65 36.05,48.88 37.12,48.88 37.43,48.56 v1(37.43,48.25)
  BOTTOM w0.14: v1(37.43,48.25) 37.43,48.62 37.26,48.8 37.01,48.8 36.8,48.59 36.8,46.83 36.56,46.59 J1.4
MIPI0_D1P: length 11.8
  TOP w0.14: v1(37.43,49.27) 36.21,49.27 33.67,51.81 33.67,53.99 U2.E11
  BOTTOM w0.14: v1(37.43,49.27) 37.36,49.19 36.85,49.19 36.4,48.75 36.4,46.99 36.17,46.76 36.17,45.99 J1.6
MIPI0_D2M: length 11.9
  TOP w0.14: v1(28.16,50.92) 28.16,50.64 28.38,50.43 28.94,50.43 29.16,50.65 29.16,50.94 29,51.1 29,51.39 29.16,51.55 29.16,51.84 29,52 29,52.3 29.16,52.45 U2.J12
  BOTTOM w0.14: J1.28 31.76,45.99 31.75,46
  BOTTOM w0.152: v1(28.16,50.92) 28.5,50.59 29.1,50.59 29.76,49.92 29.76,48.65 29.89,48.52 30.11,48.52 30.21,48.62 30.43,48.62 30.65,48.41 30.65,48.19 30.54,48.08 30.54,47.87 31.75,46.66 31.75,46
MIPI0_D2P: length 12
  TOP w0.14: U2.J11 29.67,53.99 29.67,53.08 29.55,52.97 29.55,50.48 29.1,50.03 28.29,50.03 v1(28.16,49.91)
  BOTTOM w0.152: J1.30 31.34,46 31.34,46.49 29.36,48.48 29.36,49.76 28.93,50.18 28.53,50.18 28.26,49.91 v1(28.16,49.91)
MIPI0_D3M: length 10.2
  TOP w0.14: U2.D12 34.27,53.39 34.27,52.89 34.77,52.4 34.77,51.43 35.02,51.18 v1(35.27,51.18)
  BOTTOM w0.14: v1(35.27,51.18) 35.27,51.43 34.91,51.8 34.68,51.8 34.52,51.65 34.52,50.58 33.83,49.88 33.83,47.85 34.15,47.52 34.15,45.99 J1.16
MIPI0_D3P: length 10.3
  TOP w0.14: U2.D11 34.67,53.99 34.67,53.05 35.27,52.45 v1(35.27,52.19)
  BOTTOM w0.14: J1.18 33.76,47.36 33.43,47.69 33.43,50.05 34.13,50.74 34.13,51.81 34.51,52.19 v1(35.27,52.19)
OVDD_1V8: length 6.6
  TOP w0.381: U2.M6 v2(25.66,60) ; U2.J6 v1(28.66,60) ; U2.K2 v2(27.66,64) ; U2.J9 v2(28.66,56)
  BOTTOM w0.381: 27.04,66.9 R1.1 C1.1 29.56,65.7 R4.1
PWM: length 22.6
  ART03 w0.305: v1(27.39,41.84) 26.97,42.27 19.83,42.27 16.8,45.3 16.8,50.21 14.81,52.2 J3.3
  BOTTOM w0.203: v1(27.39,41.84) 27.8,42.25 29.18,42.25 29.36,42.42 29.36,42.46 29.36,42.46 J1.39
SENSOR_CLK: length 33.7
  TOP w0.152: U2.J1 v2(28.66,65)
  ART03 w0.152: v2(28.66,65) 28.17,64.51 25.37,64.51 24.1,63.24 24.1,50.79 29.23,45.66 31.26,45.66 33.65,43.27 v1(33.65,41.82)
  BOTTOM w0.152: J1.17 33.76,41.92 v1(33.65,41.82)
SENSOR_RESET: length 36.1
  TOP w0.152: U2.H2 v2(29.66,64)
  ART04 w0.152: v1(34.04,41.15) 34.21,41.32 34.21,42.01 32.89,43.33 26.83,43.33 24.22,45.94 24.22,54.86 29.18,59.81 29.18,63.52 v2(29.66,64)
  BOTTOM w0.152: C70.1 30.13,64.47 v2(29.66,64) ; v1(34.04,41.15) 34.18,41.29 34.18,42.25 34.16,42.27 J1.15
SPI0_CLK: length 37.8
  TOP w0.152: U2.J2 v2(28.66,64)
  ART03 w0.152: v1(38.33,41.82) 37.35,41.82 32.99,46.17 29.4,46.17 24.64,50.94 24.64,63.02 25.11,63.49 28.16,63.49 v2(28.66,64)
  BOTTOM w0.152: J1.5 36.16,42.27 36.73,41.7 38.21,41.7 v1(38.33,41.82)
SPI0_CS: length 37.3
  TOP w0.152: U2.F2 v2(32.66,64)
  ART04 w0.152: v2(32.66,64) 33.11,63.54 33.11,61.21 32.35,60.45 31.26,60.45 25.14,54.33 25.14,46.51 27.1,44.55 33.21,44.55 35.92,41.84 v1(35.92,41.33)
  BOTTOM w0.152: J1.9 35.36,42.2 35.91,41.65 35.91,41.4 35.92,41.39 v1(35.92,41.33)
SPI0_MISO: length 38.6
  TOP w0.152: U2.E1 v2(33.66,65)
  ART04 w0.152: v2(33.66,65) 33.13,65.53 31.8,65.53 31.08,64.81 31.08,61.03 24.68,54.63 24.68,46.28 26.95,44.01 32.78,44.01 v1(35.12,41.67)
  BOTTOM w0.152: J1.11 34.96,41.83 v1(35.12,41.67)
SPI0_MOSI: length 42.1
  TOP w0.152: U2.F1 v2(32.66,65)
  ART04 w0.152: v2(32.66,65) 33.17,64.49 33.85,64.49 34.13,64.22 34.13,59.81 33.78,59.46 33.39,59.46 31.92,57.98 31.92,57.3 31.51,56.89 28.62,56.89 25.62,53.89 25.62,46.7 26.99,45.33 33.11,45.33 v1(37.29,41.16)
  BOTTOM w0.152: v1(37.29,41.16) 36.84,41.16 35.76,42.24 J1.7
VI_POWER1: length 16.5
  ART03 w0.381: v1(32.41,41.13) 32.41,41.31 32.86,41.76 32.86,42.78 30.76,44.88 28.02,44.88 24.64,48.25 v1(23.59,48.25)
  BOTTOM w0.152: J1.21 32.96,42.28 32.86,42.19 32.41,41.73 v1(32.41,41.13)
  BOTTOM w0.381: R8.1 v1(23.59,48.25)
VI_POWER2: length 17
  ART03 w0.381: v1(22.32,48.25) 22.94,47.63 23.89,47.63 27.55,43.97 30.71,43.97 32.2,42.49 32.2,41.87 31.6,41.28 v1(31.52,41.28)
  BOTTOM w0.152: v1(31.52,41.28) 32.56,42.31 J1.23
  BOTTOM w0.381: R7.1 v1(22.32,48.25)
$3N29: length 2.6
  BOTTOM w0.381: U3.3 29.26,72.61 C4.1 R2.2
$3N34: length 3
  BOTTOM w0.381: U3.4 28.98,68.95 29.25,68.68 29.81,68.68 C32.1
$3N39: length 4.8
  BOTTOM w0.381: R5.1 C1.2 R1.2 28.03,67.97 U3.5
$3N342: length 5.1
  BOTTOM w0.381: U5.5 40.73,52.8 R10.1 41.85,53.92 C78.2 41.85,55.95 R11.2
$3N343: length 2.1
  BOTTOM w0.381: C42.1 39.87,52.66 39.79,52.57 U5.4
$3N344: length 3.3
  BOTTOM w0.381: R9.2 C5.1 39.79,47.12 U5.3
$3N361: length 0.7
  BOTTOM w0.381: C24.1 44.54,54.48
$4N521: length 1.4
  TOP w0.381: U2.B7 v2(36.66,58)
  BOTTOM w0.381: v2(36.66,58) 36.16,57.5 C49.1
$4N523: length 1.4
  TOP w0.381: U2.C7 v2(35.66,58)
  BOTTOM w0.381: v2(35.66,58) 36.15,58.49 C48.1
$4N534: length 1.4
  TOP w0.381: U2.A3 v2(37.66,62)
  BOTTOM w0.381: C47.1 37.15,62.51 v2(37.66,62)
$4N536: length 1.5
  TOP w0.381: U2.B3 v2(36.66,62)
  BOTTOM w0.381: v2(36.66,62) 36.25,62.41 C46.1
$4N538: length 1.4
  TOP w0.381: U2.A7 v2(37.66,58)
  BOTTOM w0.305: C45.1 37.18,58.48 v2(37.66,58)
$4N542: length 1.4
  TOP w0.381: U2.C8 v2(35.66,57)
  BOTTOM w0.381: C44.1 35.66,56.97 v2(35.66,57)
$4N544: length 1.4
  TOP w0.381: U2.C9 v2(35.66,56)
  BOTTOM w0.381: C23.1 36.16,55.5 v2(35.66,56)
$4N555: length 2.8
  TOP w0.381: U2.C6 v2(35.66,60) ; U2.D5 v2(34.66,61)
  BOTTOM w0.381: v2(35.66,60) 35.19,60.47 C51.2 35.16,60.5 v2(34.66,61)
$4N557: length 2.1
  TOP w0.381: U2.D6 v2(34.66,60) U2.C5
  BOTTOM w0.381: v2(34.66,60) 35.16,59.5 C50.2
$4N622: length 1.8
  TOP w0.381: U2.H1 v2(29.66,65)
  BOTTOM w0.381: R4.2 30.35,65.48 29.87,65 v2(29.66,65)
$5N8: length 12.8
  ART03 w0.381: v1(15.65,69.78) 17.24,68.19 v1(19.14,68.19)
  BOTTOM w0.381: v1(19.14,68.19) 18.83,68.51 Q2018.1 19.27,69.93 19.27,73.25 R2381.1 ; v1(15.65,69.78) C2404.2 R2390.2
$5N9: length 5.5
  BOTTOM w0.381: R2380.1 R2389.2 C2405.2 23.69,70.54 Q2019.1
$5N33: length 7
  BOTTOM w0.381: R2381.2 R2375.1 21.02,72.18 Q2019.3 21.68,71.52 21.68,67.81
$5N37: length 2
  BOTTOM w0.381: Q2013.1 19.14,65.27 R2385.2
$5N49: length 2
  BOTTOM w0.381: R2386.2 22.95,65.27 Q2014.1

## Copper pours and planes (outline as drawn; the poured copper is in the pictures)
3V3 on BOTTOM (solid shape): 21.61,44.42 21.61,44.19 21.74,44.06 23.84,44.06 24.66,43.25 26.26,43.25 26.26,41.78 26.13,41.65 19.65,41.65 19.65,41.65 19.25,41.65 18.38,42.51 18.38,44.57 18.51,44.7 21.33,44.7
3V3 on BOTTOM (solid shape): 27.4,74.42 27.4,71.75 27.15,71.5 25.11,71.5 24.86,71.75 24.86,74.04 27.15,74.04 27.15,74.42 26.89,74.42 26.89,74.04 26.64,74.04 26.64,74.42 26.38,74.42 26.38,74.04 24.86,74.04 24.86,74.67 24.99,74.8 27.02,74.8
3V3 on BOTTOM (solid shape): 45.18,72.51 45.18,70.73 44.67,70.23 43.15,70.23 43.14,70.21 41.64,70.21 41.37,69.95 41.37,67.94 40.61,67.18 39.85,67.18 39.72,67.05 39.72,64.64 39.61,64.52 39.46,64.52 39.31,64.49 39.16,64.39 39.14,64.38 37.31,64.38 37.05,64.64 37.05,67.3 37.56,67.81 38.07,67.81 38.7,68.45 38.7,72.38 39.21,72.89 44.8,72.89
3V3 on BOTTOM (solid shape): 17.11,56.26 17.11,55.49 17.62,54.99 17.62,51.68 17.24,51.3 17.24,50.03 16.99,49.78 14.19,49.78 13.94,50.03 13.94,50.29 14.05,50.29 14.09,50.27 14.16,50.24 14.23,50.21 14.31,50.2 14.39,50.19 14.42,50.19 14.81,50.19 14.84,50.19 14.92,50.2 15,50.21 15.08,50.24 15.15,50.27 15.22,50.31 15.28,50.35 15.35,50.41 16.99,50.41 16.99,50.67 16.6,50.67 16.6,50.41 15.35,50.41 15.39,50.46 15.44,50.53 15.48,50.59 15.51,50.67 15.54,50.74 15.56,50.82 15.57,50.9 15.57,50.92 16.99,50.92 16.99,51.18 16.6,51.18 16.6,50.92 15.57,50.92 15.57,50.97 15.56,51.05 15.55,51.13 15.53,51.21 15.5,51.28 15.46,51.35 15.41,51.41 15.36,51.47 15.33,51.5 15.33,51.68 15.59,51.94 15.59,55.49 16.86,55.49 16.86,55.75 16.48,55.75 16.48,55.49 15.59,55.49 15.59,56 16.86,56 16.86,56.26 16.48,56.26 16.48,56 15.59,56 15.59,56.26 15.84,56.51 16.86,56.51
3V3 on POWER05 (solid shape): outline of 12335 points within 12.67,40.51 49.65,77.49
5V0 on BOTTOM (solid shape): 42.64,49.4 42.64,48.76 42.77,48.64 47.85,48.64 48.23,48.25 48.23,47.11 48.1,46.98 43.4,46.98 42.59,46.17 41.78,46.17 41.57,46.38 41.57,47.14 41.37,47.34 41.37,49.4 41.5,49.52 42.51,49.52
AVDD_3V3 on TOP (solid shape): 45.81,61.46 45.81,56.76 44.29,55.24 38.07,55.24 37.86,55.45 36.92,56.38 36.92,56.64 37.05,56.76 37.31,56.76 37.69,56.38 43.15,56.38 44.42,57.65 44.42,60.57 43.91,61.08 41.37,61.08 39.08,58.8 37.53,58.8 37.49,58.81 37.49,58.82 37.4,58.89 37.3,58.93 37.29,58.94 36.92,59.3 36.92,59.68 37.05,59.81 37.31,59.81 37.56,59.56 38.07,59.56 38.54,60.03 38.55,60.04 41.36,62.84 41.37,62.86 41.39,62.86 44.42,62.86
AVDD_3V3 on BOTTOM (solid shape): 46.96,59.56 46.96,56.89 46.7,56.64 44.8,56.64 44.54,56.89 44.54,59.56 44.67,59.68 46.83,59.68
AVDD_3V3 on ART03 (solid shape): outline of 157 points within 34.44,53.46 45.81,59.68
AVDD_3V3 on ART04 (solid shape): outline of 115 points within 37.32,55.92 45.69,62.48
DVDD_1V2 on BOTTOM (solid shape): 36.77,72.14 36.77,68.57 34.94,68.57 33.91,67.53 32.26,67.53 32.19,67.6 32.19,67.69 32.86,67.69 32.86,68.19 32.61,68.19 32.61,67.69 32.19,67.69 32.19,69.47 31.84,69.83 31.84,72.11 31.83,72.16 31.91,72.16 31.91,72.76 31.97,72.81 32,72.81 32.06,72.81 32.12,72.82 32.14,72.83 36.09,72.83
DVDD_1V2 on ART03 (solid shape): outline of 2076 points within 27.15,52.45 37.81,70.48
GND on TOP (solid shape): outline of 3493 points within 12.67,40.51 49.65,77.49
GND on BOTTOM (solid shape): 42.44,68.99 42.44,62.52 42.56,62.39 42.56,61.01 42.39,60.83 40.73,60.83 40.59,60.97 40.59,61.46 42.39,61.46 42.39,61.72 41.88,61.72 41.88,61.46 40.59,61.46 40.59,61.97 42.39,61.97 42.39,62.22 41.88,62.22 41.88,61.97 40.59,61.97 40.59,62.3 40.32,62.57 39.44,62.57 39.38,62.57 39.19,62.76 39.19,64.18 39.24,64.2 39.28,64.22 39.31,64.25 39.34,64.27 39.37,64.3 39.41,64.31 39.45,64.32 39.46,64.32 39.69,64.32 39.92,64.55 39.92,66.83 40.06,66.97 40.69,66.97 41.57,67.86 41.57,68.32 42.31,68.32 42.31,68.75 42.21,68.75 42.21,68.32 41.83,68.32 41.83,68.75 41.7,68.75 41.7,68.32 41.57,68.32 41.57,69.02 41.69,69.13 42.29,69.13
GND on BOTTOM (solid shape): outline of 2109 points within 12.67,40.51 49.65,77.49
GND on GND02 (solid shape): outline of 6133 points within 12.67,40.51 49.65,77.49
GND on ART03 (solid shape): outline of 3334 points within 12.67,40.51 49.65,77.49
GND on ART04 (solid shape): 33.39,62.59 33.44,62.67 33.53,62.68 33.63,62.66 33.73,62.66 33.81,62.64 33.85,62.56 33.85,60.44 33.81,60.36 33.73,60.34 33.38,60.19 33.37,59.81 33.37,59.76 33.33,59.74 33.28,59.74 30.71,57.17 28.63,57.17 28.53,57.23 28.55,57.34 31.38,60.17 32.47,60.17 33.39,61.09
GND on ART04 (solid shape): outline of 4690 points within 12.67,40.51 49.65,77.49
OVDD_1V8 on BOTTOM (solid shape): outline of 403 points within 21.3,50.54 29.56,70.99
$3N361 on BOTTOM (solid shape): 47.08,56.26 47.08,53.72 46.96,53.59 45.69,53.59 44.93,54.35 43.78,54.35 43.4,53.97 43.4,52.95 42,51.56 42,50.7 41.98,50.68 41.41,50.68 41.37,50.72 41.37,52.32 42.39,53.33 42.39,54.22 43.02,54.22 43.02,54.48 42.64,54.48 42.64,54.22 42.39,54.22 42.39,54.73 43.02,54.73 43.02,54.99 42.64,54.99 42.64,54.73 42.39,54.73 42.39,55.11 42.51,55.24 45.18,55.24 45.43,55.49 45.43,56.13 45.69,56.38 46.96,56.38
$3N401 on BOTTOM (solid shape): 48.48,69.46 48.48,65.53 48.35,65.4 45.43,65.4 45.05,65.02 45.05,62.48 45.56,61.97 46.7,61.97 46.96,61.72 46.96,60.57 46.7,60.32 43.53,60.32 42.77,61.08 42.77,61.46 43.4,61.46 43.4,61.72 43.02,61.72 43.02,61.46 42.77,61.46 42.77,61.97 43.4,61.97 43.4,62.22 43.02,62.22 43.02,61.97 42.77,61.97 42.77,62.48 42.64,62.61 42.64,69.21 43.15,69.72 48.23,69.72

## Text on the board
BOTTOM: IMX185_MIPIREFB VER.B ARTWORK BOTTOM
Ref Des/Silkscreen Bottom: A | F | B | E | D | G | IMX185_MIPIREFB VER.B SILKSCREEN BOTTOM
User.Comments: IMX185_MIPIREFB VER.B SOLDMASK TOP | IMX185_MIPIREFB VER.B SOLDMASK BOTTOM
TOP: IMX185_MIPIREFB VER.B ARTWORK TOP
Ref Des/Silkscreen Top: IMX185_MIPIREFB VER.B | IMX185_MIPIREFB VER.B SILKSCREEN TOP
GND02: IMX185_MIPIREFB VER.B GROUND PLANE02
ART03: IMX185_MIPIREFB VER.B ARTWORK LAYER03
ART04: IMX185_MIPIREFB VER.B ARTWORK LAYER04
POWER05: IMX185_MIPIREFB VER.B POWER PLANE05
DIMENSION: 1--Gerber TOP | 2--GROUND PLANE02 | 3--Gerber LAYER03 | 4--Gerber LAYER04 | 5--POWER PLANE05 | 6--Gerber BOTTOM
DISPLAY_BOTTOM: IMX185_MIPIREFB VER.B PASTEMASK BOTTOM
DISPLAY_TOP: IMX185_MIPIREFB VER.B PASTEMASK TOP
DEVICE_TYPE_TOP: FIGURE | SIZE | 8.0 | 10.0 | 20.0 | 79.0 | 83.0 | 32.0 | DRILL CHART: TOP to BOTTOM | ALL UNITS ARE IN MILS | PLATED | NON-PLATED | QTY | 77 | 201 | 12 | 2 | 72
